# EAGLE board untitled (EAGLE 9.6.1)
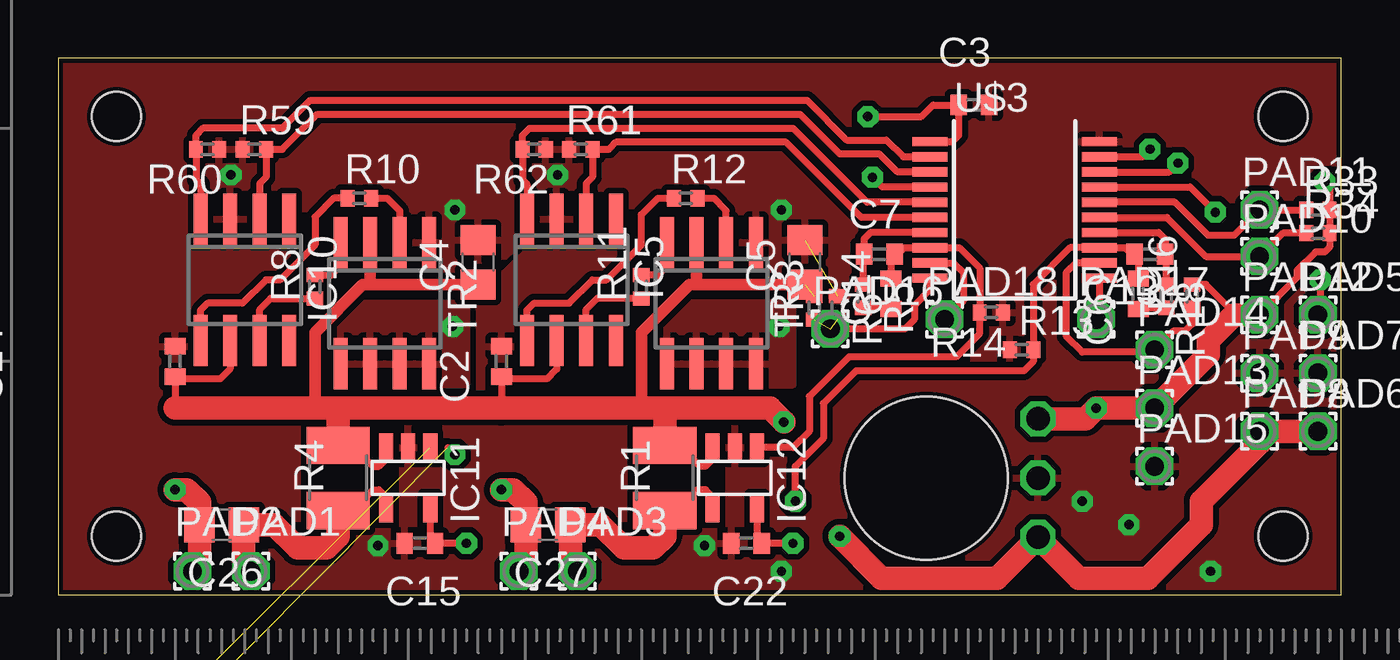
[diagram p0: board, top side]
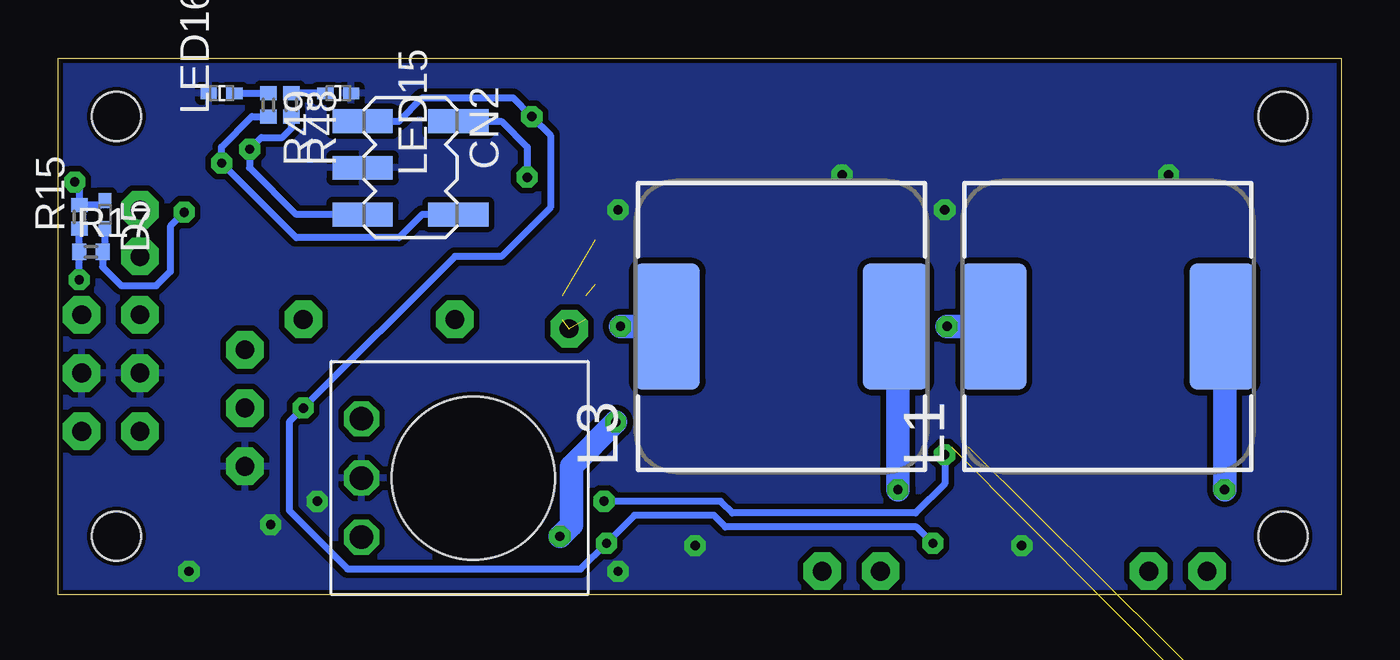
[diagram p1: board, bottom side, seen from below]

Size 55 x 23 mm. Coordinates in mm from the lower left corner, seen from the top.
Outline: 0,0 55,0 55,23 0,23 0,0
Copper layers (1*16): Top 0.035mm / dielectric 1.5mm / Bottom 0.035mm
Design rules "SeeedStudio_2layer_DRU_no_angle_20140221_IMD555 *": minimum track width 0.3mm, minimum drill 0.4mm, track to track 0.25mm, track to pad 0.3mm, pad to pad 0.25mm, via to via 0.3mm, smd to smd 0mil, copper to edge 0.2mm, drill to drill 10mil, minimum pad ring 0.25mm, minimum via ring 0.2mm, stop-mask expansion 0.03mm, vias tented up to drill 5mm, thermal gap 0.25mm
Holes 2.1 mm at 2.5,2.5 2.5,20.5 52.5,2.5 52.5,20.5
tRestrict: 5 lines

## Footprints (pad centres in the part's own frame; a part is rotated, then mirrored left to right if it is on the bottom)
C0402 = smd 0.7 x 0.9: 1 -0.65,0; 2 0.65,0
C0805 = smd 1.3 x 1.5: 1 -0.95,0; 2 0.95,0
MINI-ICSP = smd 1 x 2.6: GND 0,-2.05; PGC 2,2.05; PGD 2,-2.05; VCC -2,-2.05; VPP -2,2.05
VMN2 = smd 0.65 x 0.55: A 0.6,0; C -0.6,0
SO-08 = smd 0.6 x 2.2: 1 -1.905,-2.6; 2 -0.635,-2.6; 3 0.635,-2.6; 4 1.905,-2.6; 5 1.905,2.6; 6 0.635,2.6; 7 -0.635,2.6; 8 -1.905,2.6
SOT23-5 = smd 0.6 x 1.2: 1 -0.95,-1.306; 2 0,-1.306; 3 0.95,-1.306; 4 0.95,1.306; 5 -0.95,1.306
SCRH125 = smd 5.4 x 2.8: 1 0,4.9; 2 0,-4.9
CHIP-LED1005 = smd 0.5 x 0.7: A 0,-0.55; C 0,0.55
1,6/0,8 = drill 0.813 pad 1.6 octagon: 1 0,0
R1210 = smd 1.6 x 2.7: 1 -1.4,0; 2 1.4,0
R0402 = smd 0.6 x 0.7: 1 -0.5,0; 2 0.5,0
VXO78-500 = drill 1 octagon: 1 2.54,0; 2 0,0; 3 -2.54,0 | hole 7: 0,4.8
SSOP20 = smd 0.4 x 1.5: 1 -2.925,-3.625; 2 -2.275,-3.625; 3 -1.625,-3.625; 4 -0.975,-3.625; 5 -0.325,-3.625; 6 0.325,-3.625; 7 0.975,-3.625; 8 1.625,-3.625; 9 2.275,-3.625; 10 2.925,-3.625; 11 2.925,3.625; 12 2.275,3.625; 13 1.625,3.625; 14 0.975,3.625; 15 0.325,3.625; 16 -0.325,3.625; 17 -0.975,3.625; 18 -1.625,3.625; 19 -2.275,3.625; 20 -2.925,3.625

## Placement (x,y rotation side)
C2  0.1u  [C0402]  19,10 90 top
C3  0.1u  [C0402]  39.25,21 0 top
C4  [C0805]  18,14.25 90 top
C5  [C0805]  32,14.25 90 top
C6  [C0402]  46.3,12.9 90 top
C7  [C0402]  35.2,14.6 0 top
C13  [C0402]  46.8,14.6 180 top
C14  [C0402]  35.7,12.9 90 top
C15  [C0402]  15.5,2.2 180 top
C22  0.1u  [C0402]  29.5,2.2 180 top
C24  0.1u  [C0402]  5,10 90 top
C26  [C0805]  7,3 180 top
C27  [C0805]  21,3 180 top
CN2  ICSP  [MINI-ICSP]  39.9,18.3 270 bottom
D5  [VMN2]  53,16.3 270 bottom
IC5  MCP14E5  [SO-08]  22,13.5 180 top
IC10  MCP14E5  [SO-08]  8,13.5 180 top
IC11  INA138  [SOT23-5]  15,5 180 top
IC12  INA138  [SOT23-5]  29,5 180 top
L1  22u  [SCRH125]  10,11.5 90 bottom
L3  22u  [SCRH125]  24,11.5 90 bottom
LED15  Red  [CHIP-LED1005]  43,21.5 270 bottom
LED16  Green  [CHIP-LED1005]  48,21.5 90 bottom
PAD1  [1,6/0,8]  8.25,1 0 top
PAD2  [1,6/0,8]  5.75,1 0 top
PAD3  [1,6/0,8]  22.25,1 0 top
PAD4  [1,6/0,8]  19.75,1 0 top
PAD5  [1,6/0,8]  54,12 0 top
PAD6  [1,6/0,8]  54,7 0 top
PAD7  [1,6/0,8]  54,9.5 0 top
PAD8  [1,6/0,8]  51.5,7 0 top
PAD9  [1,6/0,8]  51.5,9.5 0 top
PAD10  [1,6/0,8]  51.5,14.5 0 top
PAD11  [1,6/0,8]  51.5,16.5 0 top
PAD12  [1,6/0,8]  51.5,12 0 top
PAD13  [1,6/0,8]  47,8 0 top
PAD14  [1,6/0,8]  47,10.5 0 top
PAD15  [1,6/0,8]  47,5.5 0 top
PAD16  [1,6/0,8]  33.1,11.4 0 top
PAD17  [1,6/0,8]  44.5,11.8 0 top
PAD18  [1,6/0,8]  38,11.8 0 top
R1  5m  [R1210]  26,5 90 top
R2  100k  [R0402]  -3.5,-13.5 0 top  (outside the outline)
R3  33k  [R0402]  32.4,12.3 90 top
R4  5m  [R1210]  12,5 90 top
R5  [R0402]  34.5,12.8 270 top
R6  3.3k  [R0402]  33.4,12.3 270 top
R8  [R0402]  11,13.2 90 top
R10  [R0402]  12.9,17 0 top
R11  33  [R0402]  25,13.2 90 top
R12  33  [R0402]  26.9,17 0 top
R13  100k  [R0402]  41.3,10.5 0 top
R14  200k  [R0402]  40,12.1 180 top
R15  10k  [R0402]  54.1,16.2 90 bottom
R16  15k  [R0402]  48.6,12.8 90 top
R17  1k  [R0402]  53.6,14.7 0 bottom
R18  [R0402]  47.5,12.8 270 top
R33  15k  [R0402]  54,16.5 0 top
R34  15k  [R0402]  54,15.5 0 top
R48  330  [R0402]  45,21 270 bottom
R49  330  [R0402]  46,21 270 bottom
R59  10k  [R0402]  8.4,19.1 0 top
R60  10k  [R0402]  6.4,19.1 180 top
R61  10k  [R0402]  22.4,19.1 0 top
R62  10k  [R0402]  20.4,19.1 180 top
TR2  MOSFET_N_P_AO4630  [SO-08]  14,12.5 180 top
TR3  MOSFET_N_P_AO4630  [SO-08]  28,12.5 180 top
U$1  [RULER-S]  0,-4.5 0 top  (outside the outline)
U$2  78-DC/DCV  [VXO78-500]  42,5 270 bottom
U$3  PIC16F1769SS  [SSOP20]  41,16.5 270 top
U$4  [RULER-S]  -2,0 90 top
U$5  [RULER-S]  13.5,-10 0 top  (outside the outline)

## Library data of the parts
C2-C7 C13-C15 C22 C24 C26 C27 = rcl; SPICEPREFIX: C
CN2 IC5 IC10 LED15 LED16 TR2 TR3 U$1-U$5 = 0 my parts
D5 = 5 D
IC11 IC12 = burr-brown; MF: TEXAS INSTRUMENTS; MPN: INA138NA/250; OC_FARNELL: 1564888; OC_NEWARK: 80K5906
L1 L3 = 2 RCL
PAD1-PAD18 = 4 PAD
R1-R6 R8 R10-R18 R33 R34 R48 R49 R59-R62 = rcl; SPICEPREFIX: R

## Nets
GND: C2.2 C3.2 C4.2 C5.2 C15.2 C22.2 C24.2 CN2.GND IC5.3 IC10.3 IC11.2 IC12.2 LED15.C LED16.C PAD7.1 PAD9.1 PAD15.1 R6.1 R13.1 R14.1 R59.1 R60.1 R61.1 R62.1 TR2.1 TR3.1 U$2.2 U$3.20
N$1: IC11.1 R2.1
N$3: CN2.VPP U$3.4
N$4: PAD16.1 R3.1 R6.2 U$3.10
N$5: IC5.4 R62.2 U$3.5
N$6: C26.1 IC11.4 PAD1.1 R4.1
N$8: IC10.2 R59.2 U$3.3
N$9: C26.2 L1.2 PAD2.1
N$12: IC10.4 R60.2 U$3.2
N$14: CN2.PGD R48.2 U$3.19
N$15: IC5.2 R61.2 U$3.6
N$16: CN2.PGC R49.2 U$3.18
N$19: C6.2 C13.2 R2.2 R13.2 U$3.13
N$20: C7.2 C14.2 IC12.1 R14.2 U$3.8
N$21: PAD17.1 U$3.11
N$22: PAD18.1 U$3.9
N$23: PAD14.1 R16.1 U$3.12
N$24: C14.1 R5.2
N$26: L3.1 TR3.5 TR3.6 TR3.7 TR3.8
N$31: D5.A R17.2 U$3.17
N$32: R10.2 TR2.2
N$33: C27.2 L3.2 PAD4.1
N$36: C13.1 R18.1 U$3.14
N$37: L1.1 TR2.5 TR2.6 TR2.7 TR2.8
N$38: R11.2 TR3.4
N$42: R12.2 TR3.2
N$55: R8.2 TR2.4
N$57: PAD5.1 R15.1 R17.1
N$70: PAD10.1 R34.1 U$3.15
N$71: PAD11.1 R33.1 U$3.16
N$73: IC10.7 R8.1
N$79: C27.1 IC12.4 PAD3.1 R1.1
N$80: IC5.7 R11.1
N$89: C6.1 R18.2
N$90: C7.1 R5.1 U$3.7
N$103: LED15.A R48.1
N$104: LED16.A R49.1
N$115: IC10.5 R10.1
N$116: IC5.5 R12.1
V+: C2.1 C4.1 C5.1 C24.1 IC5.6 IC10.6 IC11.3 IC12.3 PAD6.1 PAD8.1 R1.2 R3.2 R4.2 TR2.3 TR3.3 U$2.1
VDD: C3.1 C15.1 C22.1 CN2.VCC D5.C IC11.5 IC12.5 PAD12.1 PAD13.1 R15.2 R16.2 R33.2 R34.2 U$2.3 U$3.1

## Tracks (layer width: path | path; a pad name or v marks a point on that pad's centre or on a via)
GND  (via drill 0.4 pad 0.9)  (1 unrouted)
  other vias: 7.4,18 21.4,18 31,1 13.7,2.1 17,16.5 31,16.5 27.7,2.1 43.9,4 45.9,3 49.4,1
  pour Top (rank 6): 0,23 55,23 55,0 0,0
  pour Bottom (rank 6): 0,23 55,23 55,0 0,0
N$1  (1 unrouted)
N$3  (via drill 0.4 pad 0.9)
  Top 0.3: U$3.4 35.33,17.48 v34.9,17.9
  Bottom 0.3: CN2.VPP 36,20.3 34.9,19.2 v34.9,17.9
N$4  (2 unrouted)
  Top 0.3: U$3.10 37.38,13.07 36.7,12.4 36.7,11.8 36.3,11.4 PAD16.1
N$5
  Top 0.3: IC5.4 20.09,17.61 19.9,17.8 R62.2 19.9,19.7 20.2,20 31.5,20 34.67,16.82 U$3.5
N$6
  Top 0.3: IC11.4 14.05,4.2 13.75,4.5 13.5,4.5 12.6,3.6 R4.1
  Top 1: PAD1.1 7.95,1.3 C26.1 9.25,3 10.25,2 11.5,2 12,2.5 R4.1
N$8
  Top 0.3: IC10.2 8.63,17.64 8.9,17.9 R59.2 9.6,19.1 11.1,20.6 31.8,20.6 33.5,18.9 35.2,18.9 35.98,18.12 U$3.3
N$9  (via drill 0.4 pad 0.9)
  Top 1: PAD2.1 6.05,1.3 C26.2 6.05,3.95 5.5,4.5 v5,4.5
  Bottom 1: v5,4.5 5,11.4 L1.2
N$12
  Top 0.3: IC10.4 6.09,17.61 5.9,17.8 R60.2 5.9,19.7 6.2,20 9.6,20 10.8,21.2 32.1,21.2 33.8,19.5 35.5,19.5 36.23,18.77 U$3.2
N$14  (via drill 0.4 pad 0.9)
  Top 0.3: U$3.19 46.48,18.77 v46.8,19.1
  Bottom 0.3: CN2.PGD 44.8,16.3 46.8,18.3 v46.8,19.1 46.3,19.6 45.4,19.6 45,20 R48.2
N$15
  Top 0.3: IC5.2 22.64,17.64 22.9,17.9 R61.2 23.6,19.1 23.9,19.4 31.2,19.4 34.42,16.18 U$3.6
N$16  (via drill 0.4 pad 0.9)
  Top 0.3: U$3.18 47.62,18.12 v48,18.5
  Bottom 0.3: CN2.PGC 39.4,16.3 40.4,15.3 44.8,15.3 v48,18.5 48,19.2 46.7,20.5 R49.2
N$19  (via drill 0.4 pad 0.9)  (1 unrouted)
  Top 0.3: v17,6 16.69,6.31 | C6.2 46.3,14.45 C13.2 46,14.6 45.73,14.88 U$3.13 43.38,14.88 41.8,13.3 R13.2 41.8,10 41.4,9.6 34.2,9.6 32.8,8.2 32.8,6.7 31.6,5.5 v31.6,4
  Bottom 0.3: v17,6 17,4.75 18.25,3.5 26.1,3.5 26.6,4 v31.6,4
N$20
  Top 0.3: C14.2 35.7,14.45 C7.2 36,14.6 36.27,14.88 U$3.8 38.62,14.88 39.5,14 R14.2 39.5,11.2 38.5,10.2 33.9,10.2 32.2,8.5 32.2,7 31.51,6.31 IC12.1
N$21
  Top 0.3: U$3.11 44.62,11.93 PAD17.1
N$22
  Top 0.3: U$3.9 38.38,14.22 38.8,13.8 38.8,12.6 PAD18.1
N$23
  Top 0.3: R16.1 48.6,11.6 48.3,11.3 47.8,11.3 PAD14.1 46.9,10.4 43.9,10.4 43.2,11.1 43.2,13.8 43.62,14.22 U$3.12
N$24
  Top 0.3: C14.1 35.65,12.3 R5.2
N$26  (via drill 0.4 pad 0.9)
  Bottom 1: L3.1 v30.9,11.5
  pour Top: 31.5,12.5 26,12.5 26,9 31.5,9
N$31  (via drill 0.4 pad 0.9)
  Top 0.3: U$3.17 48.52,17.48 v49.6,16.4
  Bottom 0.3: D5.A 53,14.8 R17.2 53.1,14.05 52.3,13.25 50.8,13.25 50.2,13.85 50.2,15.8 v49.6,16.4
N$32
  Top 0.3: R10.2 14.1,17 14.63,16.46 TR2.2
N$33  (via drill 0.4 pad 0.9)
  Top 1: PAD4.1 20.05,1.3 C27.2 20.05,3.95 19.5,4.5 v19,4.5
  Bottom 1: v19,4.5 19,11.4 L3.2
N$36
  Top 0.3: R18.1 47.5,14.55 C13.1 47.45,15.25 47.17,15.53 U$3.14
N$37  (via drill 0.4 pad 0.9)
  Bottom 1: L1.1 v16.9,11.5
  pour Top: 12,12.5 17.5,12.5 17.5,9 12,9
N$38
  Top 0.3: R11.2 25.7,13.7 26.09,14.1 TR3.4
N$42
  Top 0.3: R12.2 28.1,17 28.64,16.46 TR3.2
N$55
  Top 0.3: R8.2 11.7,13.7 12.1,14.1 TR2.4
N$57  (via drill 0.4 pad 0.9)
  Top 0.3: v54.1,13.5 54.1,12.1 PAD5.1
  Bottom 0.3: R15.1 R17.1 v54.1,13.5
N$70
  Top 0.3: U$3.15 47.52,16.18 49.2,14.5 PAD10.1 52.5,15.5 R34.1
N$71
  Top 0.3: R33.1 PAD11.1 50.4,15.4 49.3,15.4 47.88,16.82 U$3.16
N$73
  Top 0.3: IC10.7 8.63,12.23 9.1,12.7 R8.1
N$79
  Top 0.3: R1.1 26.5,3.6 27.4,4.5 27.75,4.5 28.05,4.2 IC12.4
  Top 1: PAD3.1 21.95,1.3 C27.1 23.25,3 24.25,2 25.5,2 26,2.5 R1.1
N$80
  Top 0.3: IC5.7 22.64,12.23 23.1,12.7 R11.1
N$89
  Top 0.3: C6.1 46.35,12.3 R18.2
N$90
  Top 0.3: U$3.7 34.83,15.53 34.55,15.25 C7.1 34.5,14.55 R5.1
N$103
  Bottom 0.3: LED15.A R48.1
N$104
  Bottom 0.3: LED16.A R49.1
N$115
  Top 0.3: IC10.5 6.09,12.2 6.4,12.5 7.9,12.5 8.9,13.5 9.5,13.5 11,15 11,16.2 11.8,17 R10.1
N$116
  Top 0.3: IC5.5 20.09,12.2 20.4,12.5 21.9,12.5 22.9,13.5 23.5,13.5 25,15 25,16.3 25.7,17 R12.1
V+  (via drill 0.4 pad 0.9)  (1 unrouted)
  Top 0.3: R4.2 12.6,6.4 13.5,5.5 13.75,5.5 14.05,5.8 IC11.3 | IC5.6 21.36,9.66 20.95,9.25 19.1,9.25 C2.1 19,8 | R1.2 26.6,6.4 27.5,5.5 27.75,5.5 28.05,5.8 IC12.3 | IC10.6 7.37,9.66 6.95,9.25 5.1,9.25 C24.1 5,8
  Top 0.5: 25,8 25,11.25 27.05,13.3 27.36,13.3 | 11,8 11,11.25 13.05,13.3 13.37,13.3 | C4.1 13.37,13.3 | 27.36,13.3 C5.1 | TR2.3 13.37,13.3 | TR3.3 27.36,13.3
  Top 1: v31.1,7.4 30.5,8 26,8 | 26,8 25,8 19,8 12,8 | R1.2 26,8 | R4.2 12,8 | 5,8 11,8 12,8 | PAD6.1 PAD8.1 51.5,6.5 49,4 49,3 46.7,0.7 43.76,0.7 U$2.1 40.24,0.7 35.3,0.7 v33.5,2.5
  Bottom 1: v33.5,2.5 33,3 33,5.5 v31.1,7.4
VDD  (via drill 0.4 pad 0.9)
  Top 0.3: v31.5,2.2 C22.1 29.95,2.4 IC12.5 | IC11.5 15.95,2.4 C15.1 v17.5,2.2 | U$3.1 38.33,19.43 38.6,19.7 C3.1 37.5,21 37,20.5 v34.7,20.5 | PAD12.1 53.1,13.6 53.1,13.9 53.9,14.7 54.3,14.7 54.5,14.9 R34.2 R33.2 54.5,17.5 v54.3,17.7 | R16.2 49.2,13.3 50.4,12.1 50.4,12
  Top 1: PAD12.1 50.4,12 49.3,10.9 49.3,10.3 PAD13.1 v44.5,8 44.04,7.54 U$2.3
  Bottom 0.3: v17.5,2.2 18.2,2.9 26.4,2.9 26.9,3.4 30.3,3.4 v31.5,2.2 32.6,1.1 42.6,1.1 45.1,3.6 45.1,7.4 v44.5,8 38,14.5 36,14.5 33.9,16.6 33.9,19.7 v34.7,20.5 35.5,21.3 39.4,21.3 40.4,20.3 CN2.VCC | D5.C 53.2,16.7 R15.2 54.1,17.5 v54.3,17.7